# Altium PCB SDC.PcbDoc (part 1 of 2)
Units mm, origin at the board's own origin, x right, y up, seen from the top; angles counter-clockwise.
Board outline 130 x 100 mm, 4 copper layers (Top Layer, Ground Plane, Power Plane, Bottom Layer), stack 1.666 mm thick; 140 components, 375 nets, 501 pads, 368 vias.
Unrouted connection lines stored in the file: 16.
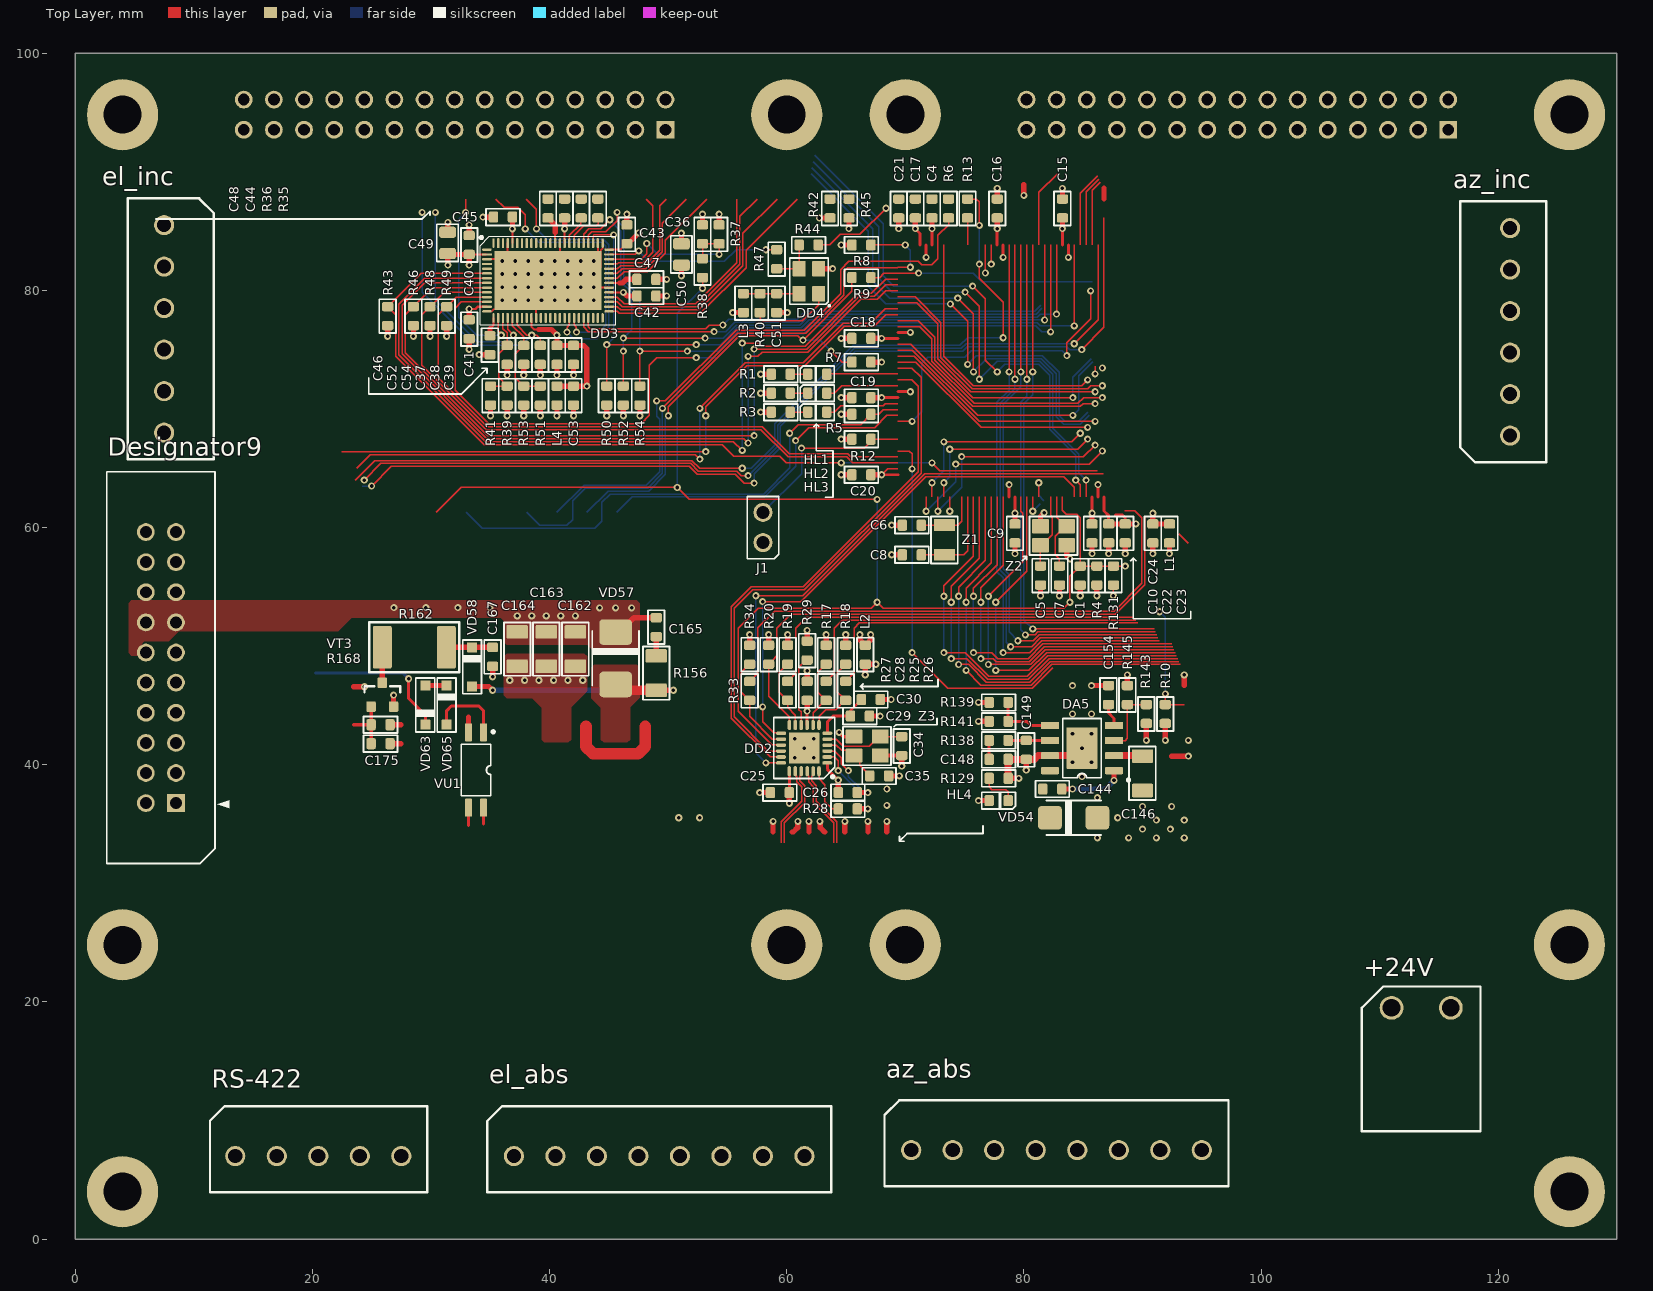
[diagram p0: Top Layer view]
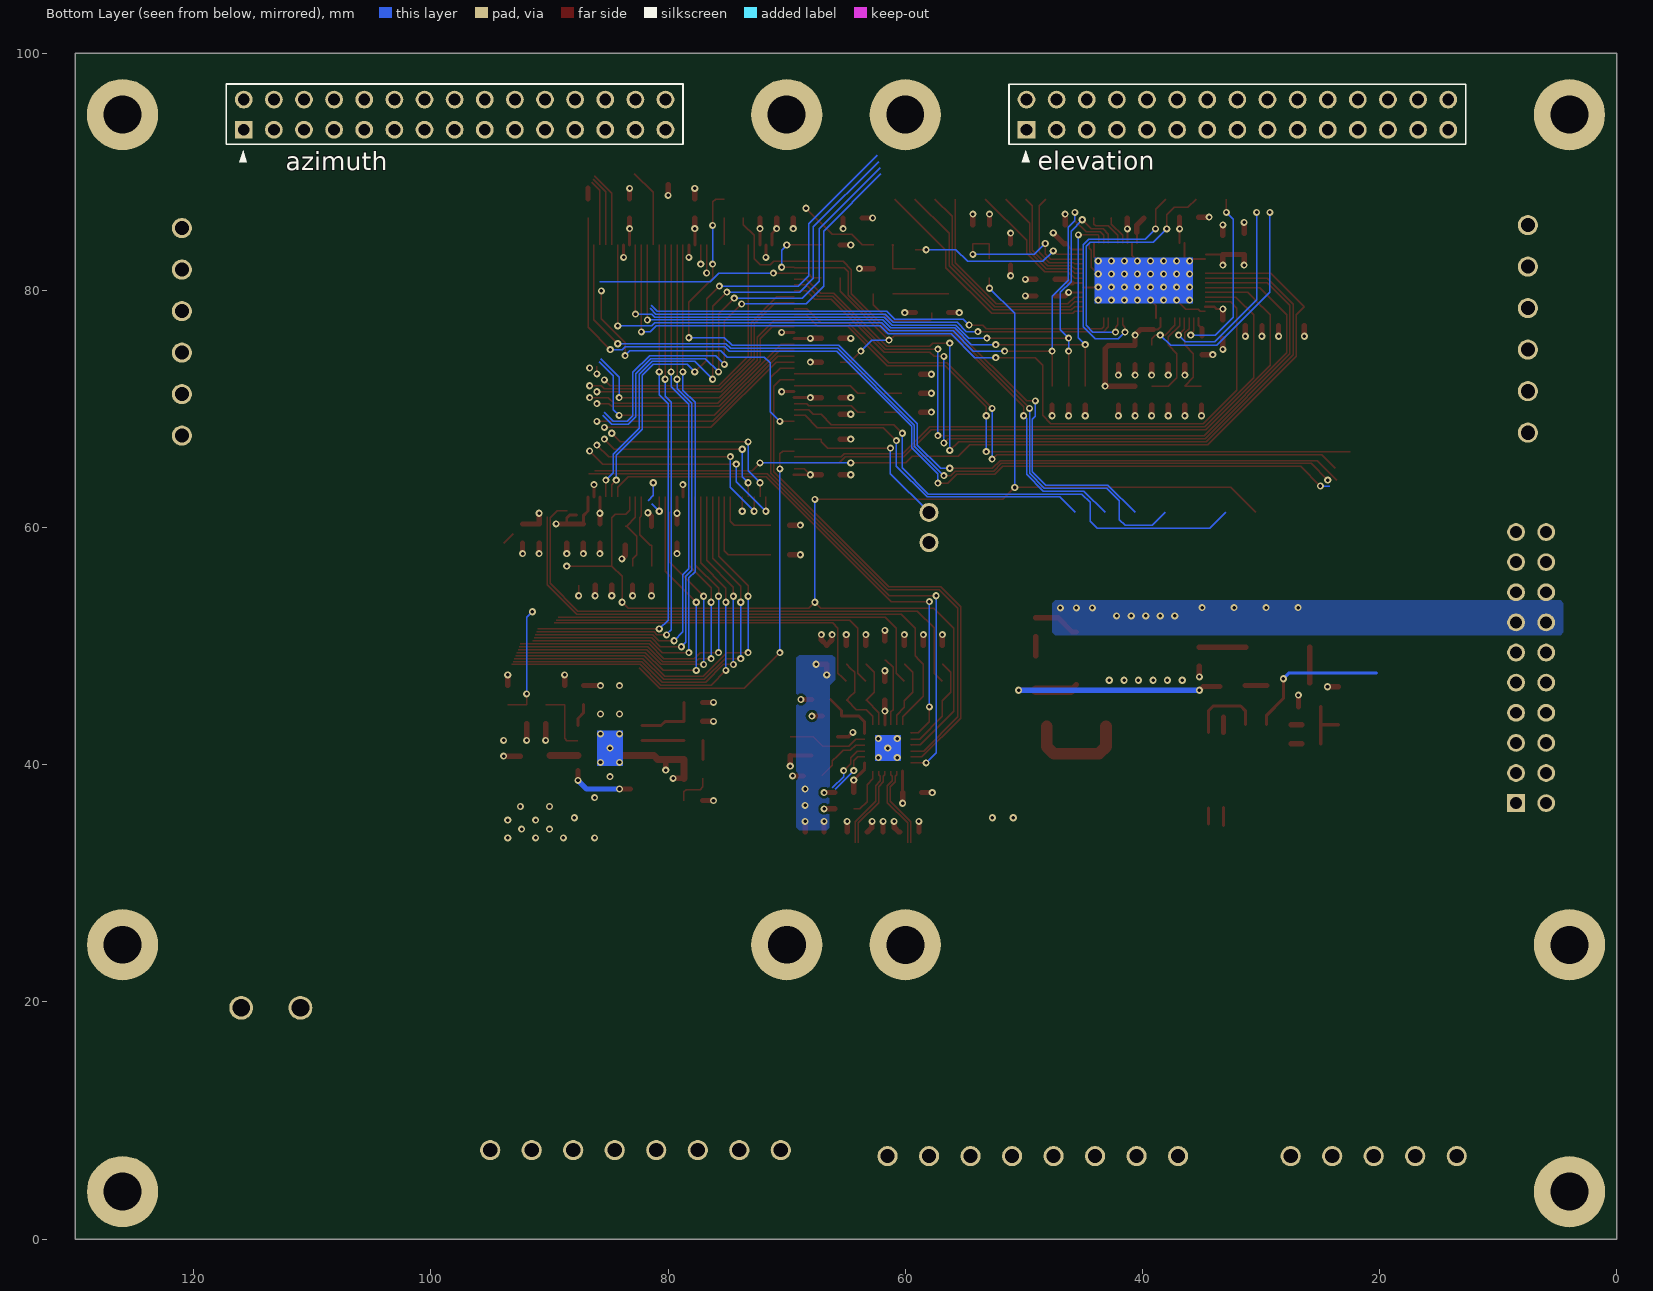
[diagram p1: Bottom Layer view, seen from below]
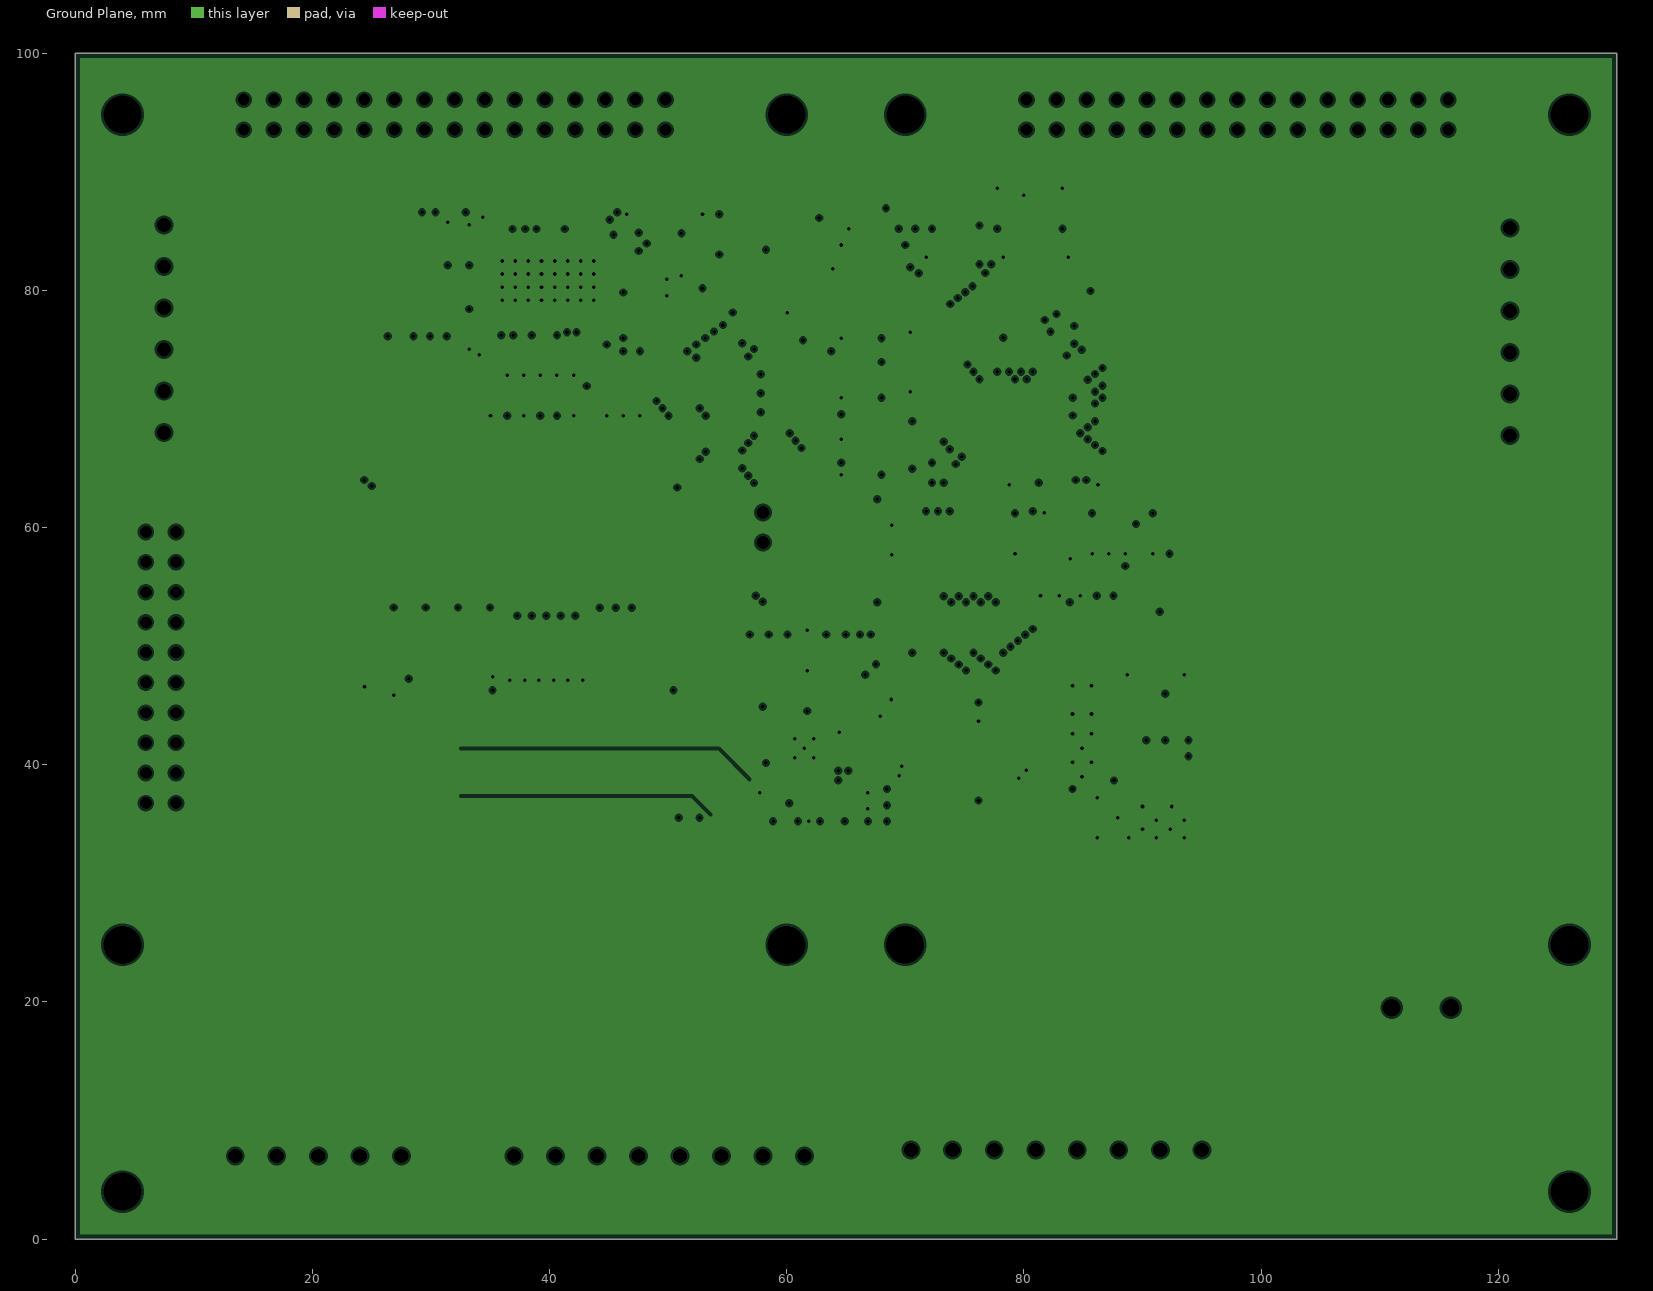
[diagram p2: Ground Plane, clearances drawn from the general rule]
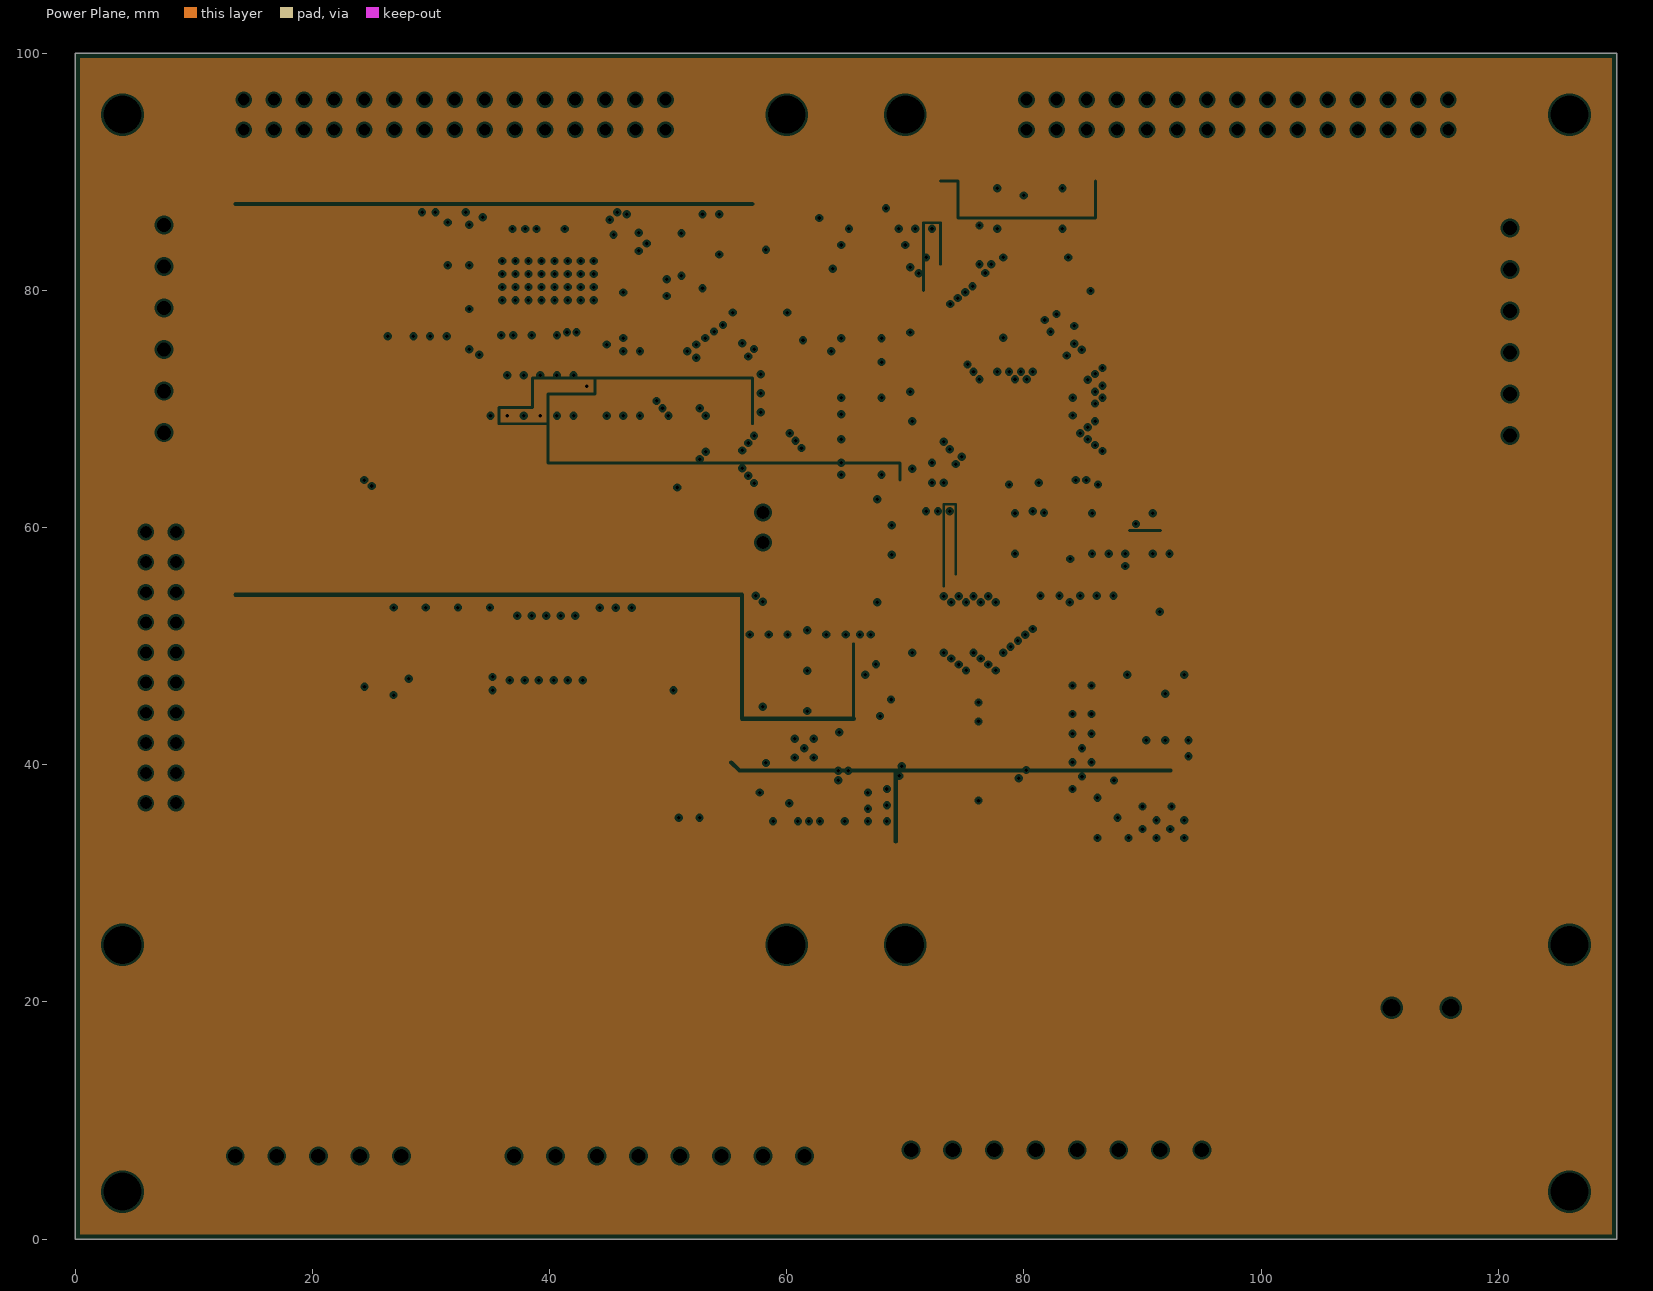
[diagram p3: Power Plane, clearances drawn from the general rule]
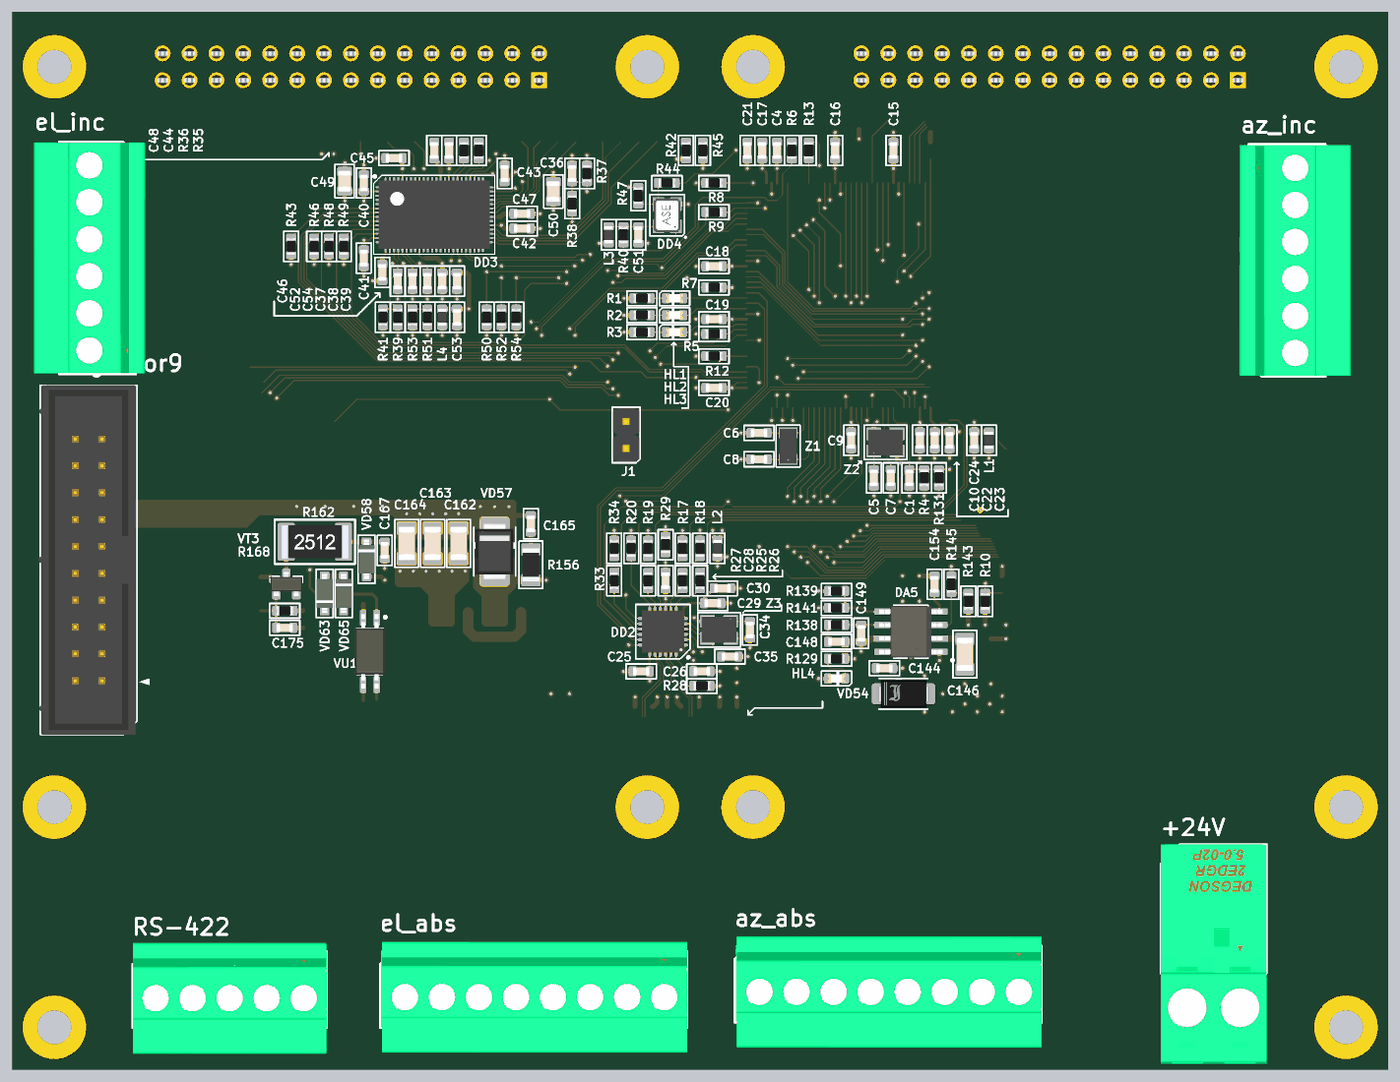
[diagram p5: 3D render of the assembled board from above, using the file's embedded part models]

## Layer stack, top to bottom
Top Solder: solder mask 0.01, Solder Resist, Dk 3.5
Top Layer: signal copper 0.018
Dielectric 1: prepreg 0.115, Dk 4.2
Ground Plane: plane copper 0.018, net (Multiple Nets)
Dielectric 3: core 1.364, Dk 4.2
Power Plane: plane copper 0.018, net (Multiple Nets)
Dielectric 2: prepreg 0.115, Dk 4.2
Bottom Layer: signal copper 0.018
Bottom Solder: solder mask 0.01, Solder Resist, Dk 3.5

## Board outline
0,0 0,100 130,100 130,0

## Design rules (kind name [scope] priority, off if disabled: settings)
Clearance ClearancePoly [InPolygon] p1: gap=0.2 ignorepadtopadclearanceinfootprint=FALSE except(0: Arc-Hole Track-Hole SMDPad-Hole THPad-Hole Via-Hole Fill-Hole Poly-Hole Region-Hole Text-Hole)
Clearance [All] p2: gap=0.125 ignorepadtopadclearanceinfootprint=FALSE except(0: Arc-Hole Track-Hole SMDPad-Hole THPad-Hole Via-Hole Fill-Hole Poly-Hole Region-Hole Text-Hole)
ComponentClearance [All] p1: gap=0 collisioncheckmode=3 verticalgap=0 showdistances=FALSE
DiffPairsRouting Ethernet_DP [(InDifferentialPairClass('ETH_RX') OR InDifferentialPairClass('ETH_TX'))] p1: maxlimit=0.13 minlimit=0.13 mostfreqgap=0.13 toplayer_minwidth=0.125 toplayer_maxwidth=0.125 toplayer_prefwidth=0.125 bottomlayer_minwidth=0.125 bottomlayer_maxwidth=0.125 bottomlayer_prefwidth=0.125 maxuncoupledlength=15
DiffPairsRouting [All] p2: maxlimit=0.254 minlimit=0.254 mostfreqgap=0.254 toplayer_minwidth=0.381 toplayer_maxwidth=0.381 toplayer_prefwidth=0.381 bottomlayer_minwidth=0.381 bottomlayer_maxwidth=0.381 bottomlayer_prefwidth=0.381 maxuncoupledlength=12.7
Height [All] p1: minheight=0 maxheight=100 prefheight=100
HoleSize [All] p1: absolutevalues=TRUE maxlimit=5 minlimit=0.3 maxpercent=80.000 minpercent=20.000
HoleToHoleClearance [All] p1: gap=0.2 allowstackedmicrovias=TRUE
MinimumAnnularRing MinimumAnnularRing_0.3 [Not IsVia] p1: minimumring=0.2
MinimumSolderMaskSliver [All] p1: minsoldermaskwidth=0.15
PlaneClearance [All] p1: clearance=0.2
PlaneConnect [All] p1: planeconnectstyle=Direct reliefexpansion=0.508 reliefentries=4 reliefconductorwidth=0.254 reliefairgap=0.254
PolygonConnect PolygonConnectVIA [IsVia] p1: connectstyle=Direct reliefconductorwidth=0.254 reliefentries=4 polygonreliefangle="90 Angle" airgapwidth=0.254
PolygonConnect [All] p2: connectstyle=Direct reliefconductorwidth=0.3 reliefentries=4 polygonreliefangle="90 Angle" airgapwidth=0.3
RoutingVias [IsVia] p1: holewidth=0.3 width=0.6 viastyle="Through Hole" minholewidth=0.3 minwidth=0.6 maxholewidth=2 maxwidth=1.5
SilkToSilkClearance [All] p1: silktosilkclearance=0
SilkToSolderMaskClearance [IsPad] p1: minsilkscreentomaskgap=0 clearancetoexposedcopper=TRUE
SolderMaskExpansion [All] p1: expansion=0.05 istentingtop=FALSE
Width Width_Arcs [IsArc] p1: maxlimit=0.254 minlimit=0.1 preferedwidth=0.254
Width [All] p2: maxlimit=10 minlimit=0.125 preferedwidth=0.125
20 further rules are at their usual default settings.

## Classes and differential pairs
differential pair class ETH_TX: ETH_TX
differential pair class ETH_RX: ETH_RX
component class POE: C162 C163 C164 C165 C167 C175 R156 R162 R168 VD57 VD58 VD63 VD65 VT3 VU1
component class DRIVER_A: C36 C37 C38 C39 C40 C41 C42 C43 C44 C45 C46 C47 C48 C49 C50 C51 C52 C53 C54 DD3 DD4 L3 L4 R35 R36 R37 R38 R39 R40 R41 R42 R43 R44 R45 R46 R47 R48 R49 R50 R51 R52 R53 R54
component class MCU: C1 C4 C5 C6 C7 C8 C9 C10 C15 C16 C17 C18 C19 C20 C21 C22 C23 C24 HL1 HL2 HL3 J1 L1 R1 R2 R3 R4 R5 R6 R7 R8 R9 R10 R12 R13 Z1 Z2
component class ETHERNET: C25 C26 C28 C29 C30 C34 C35 DD2 FV6 L2 R17 R18 R19 R20 R25 R26 R27 R28 R29 R33 R34 Z3
component class POWER: C144 C146 C148 C149 C154 DA5 HL4 R129 R131 R138 R139 R141 R143 R145 VD54
differential pair ETH_TX: +ETH_TX_P -ETH_TX_N
differential pair ETH_RX: +ETH_RX_P -ETH_RX_N

## Components (designator, comment, footprint, x,y, rotation, side; value= is the part's Value field where it differs from the comment)
+24V "Comment" "5 1x2 r" 113.5,19.5 r0 top
az_abs "Comment" "3.5 1X8" 82.75,7.5 r0 top
az_inc "Comment" "3.5 1X6" 121,76.5 r90 top
azimuth "Comment" 2.54_30P_2X15_PBD 98.002,94.816 r180 bottom
C1 "0.1uF" C0603 84.75,55.95 r90 top
C4 "2.2uF" C0603 72.25,86.9 r270 top
C5 "6.8pF" C0603 81.4,55.95 r270 top
C6 "4.7pF" C0603 70.55,60.2 r180 top
C7 "6.8pF" C0603 83,55.95 r270 top
C8 "4.7pF" C0603 70.55,57.7 r180 top
C9 "0.1uF" C0603 79.25,59.5 r90 top
C10 "0.1uF" C0603 85.75,59.5 r90 top
C15 "0.1uF" C0603 83.25,86.9 r270 top
C16 "0.1uF" C0603 77.75,86.9 r270 top
C17 "0.1uF" C0603 70.85,86.9 r270 top
C18 "0.1uF" C0603 66.3,75.95 r0 top
C19 "0.1uF" C0603 66.3,70.95 r0 top
C20 "0.1uF" C0603 66.3,64.45 r0 top
C21 "4.7uF" C0603 69.45,86.9 r270 top
C22 "0.1uF" C0603 87.15,59.5 r90 top
C23 "0.1uF" C0603 88.55,59.5 r90 top
C24 "4.7uF" C0603 90.875,59.5 r90 top
C25 "0.1uF" C0603 59.425,37.65 r0 top
C26 "0.1uF" C0603 65.15,37.65 r180 top
C28 "0.1uF" C0603 61.725,46.225 r270 top
C29 "470pF" C0603 66.175,44.1 r180 top
C30 "1uF" C0603 67.1,45.5 r180 top
C34 "6.8pF" C0603 69.7,41.575 r270 top
C35 "6.8pF" C0603 67.8,39.05 r0 top
C36 "0.1uF" C0603 52.9,84.725 r270 top
C37 "0.1uF" C0603 39.225,74.55 r90 top
C38 "0.1uF" C0603 40.625,74.55 r90 top
C39 "4.7uF" C0603 42.025,74.55 r90 top
C40 "0.1uF" C0603 33.225,83.825 r270 top
C41 "0.1uF" C0603 33.225,76.725 r90 top
C42 "0.1uF" C0603 48.175,79.525 r180 top
C43 "0.1uF" C0603 46.525,84.725 r270 top
C44 "0.1uF" C0603 41.275,86.9 r270 top
C45 "0.1uF" C0603 36.075,86.175 r0 top
C46 "0.1uF" C0603 34.975,75.375 r90 top
C47 "0.1uF" C0603 48.175,80.925 r180 top
C48 "0.1uF" C0603 39.875,86.9 r270 top
C49 "22uF" C0805 31.4,84 r270 top
C50 "22uF" C0805 51.125,83.025 r90 top
C51 "10nF" C0603 59.15,78.925 r270 top
C52 "0.1uF" C0603 36.425,74.55 r90 top
C53 "1uF" C0603 42.025,71.125 r90 top
C54 "0.1uF" C0603 37.825,74.55 r90 top
C144 "0.1uF" C0603 82.4,37.95 r0 top
C146 "10uF" C1206 90,39.275 r90 top
C148 "1nF" C0603 77.875,40.45 r180 top
C149 "6.8pF" C0603 80.2,41.25 r90 top
C154 "8.2nF" C0603 87.125,45.875 r270 top
C162 "10uF" C1206 42.175,49.75 r90 top
C163 "10uF" C1206 39.725,49.75 r90 top
C164 "10uF" C1206 37.275,49.75 r90 top
C165 "680pF" C0603 49,51.6 r90 top
C167 "0.1uF" C0603 35.2,49.1 r270 top
C175 "0.1uF" C0603 25.75,41.775 r180 top
DA5 "TPS54332" SOIC8-EP 84.9,41.4 r180 top
DD2 "LAN8742AI-CZ" S4QFN-24 61.475,41.4 r180 top
DD3 "TMC4671-LA" QFN76-EP 39.875,80.825 r0 top
DD4 "25MHz" ASE 61.875,80.775 r90 top
Designator9 "Comment" 2.54_20P_2X10_BOX 7.23,48.19 r90 top
el_abs "Comment" "3.5 1X8" 49.25,7 r0 top
el_inc "Comment" "3.5 1X6" 7.5,76.75 r270 top
elevation "Comment" 2.54_30P_2X15_PBD 32,94.81 r180 bottom
HL1 "GNL-0603SRC" LED0603 62.575,72.925 r0 top
HL2 "GNL-0603GC" LED0603 62.575,71.325 r0 top
HL3 "GNL-0603GC" LED0603 62.575,69.725 r0 top
HL4 "GNL-0603GC" LED0603 77.875,36.975 r180 top
J1 "MCU Boot" 2.54_2x1 58,60 r90 top
L1 "600R, 500mA" L0603 92.275,59.5 r90 top
L2 "600R, 500mA" L0603 66.625,49.275 r270 top
L3 "600R, 500mA" L0603 56.35,78.925 r270 top
L4 "600R, 500mA" L0603 40.625,71.125 r90 top
R1 "1.5k" R0603 59.5,72.925 r0 top
R2 "1.5k" R0603 59.5,71.325 r0 top
R3 "1.5k" R0603 59.5,69.725 r0 top
R4 "10k" R0603 86.15,55.95 r90 top
R5 "10k" R0603 66.3,69.55 r0 top
R6 "10k" R0603 73.65,86.9 r270 top
R7 "DNI" R0603 66.3,73.95 r180 top
R8 "10k" R0603 66.3,83.825 r180 top
R9 "0" R0603 66.3,81.075 r0 top
R10 "27k" R0603 91.925,44.275 r270 top
R12 "1k" R0603 66.3,67.45 r180 top
R13 "1k" R0603 75.25,86.9 r90 top
R17 "10k" R0603 63.325,49.275 r270 top
R18 "10k" R0603 64.975,49.275 r270 top
R19 "10k" R0603 60.075,49.275 r270 top
R20 "1.5k" R0603 58.475,49.275 r270 top
R25 "33" R0603 63.325,46.225 r90 top
R26 "33" R0603 64.975,46.225 r90 top
R27 "33" R0603 60.075,46.225 r90 top
R28 "12.1k" R0603 65.15,36.275 r180 top
R29 "10k" R0603 61.725,49.625 r270 top
R33 "33" R0603 56.875,46.225 r90 top
R34 "10k" R0603 56.875,49.275 r270 top
R35 "10k" R0603 44.075,86.9 r90 top
R36 "10k" R0603 42.675,86.9 r90 top
R37 "10k" R0603 54.3,84.725 r90 top
R38 "0" R0603 52.9,81.875 r270 top
R39 "10k" R0603 36.425,71.125 r270 top
R40 "1k" R0603 57.75,78.925 r270 top
R41 "10k" R0603 35.025,71.125 r90 top
R42 "10k" R0603 63.65,86.9 r270 top
R43 "10k" R0603 26.35,77.825 r270 top
R44 "33" R0603 61.85,83.825 r180 top
R45 "10k" R0603 65.25,86.9 r270 top
R46 "10k" R0603 28.525,77.825 r270 top
R47 "33" R0603 59.15,82.625 r270 top
R48 "10k" R0603 29.925,77.825 r270 top
R49 "10k" R0603 31.325,77.825 r270 top
R50 "10k" R0603 44.825,71.125 r270 top
R51 "10k" R0603 39.225,71.125 r270 top
R52 "10k" R0603 46.225,71.125 r270 top
R53 "10k" R0603 37.825,71.125 r90 top
R54 "10k" R0603 47.625,71.125 r270 top
R129 "4.02k" R0603 77.875,38.85 r180 top
R131 "0" R0603 87.55,55.95 r90 top
R138 "39.2k" R0603 77.875,42.05 r180 top
R139 "10.2k" R0603 77.875,45.25 r0 top
R141 "1.96k" R0603 77.875,43.65 r180 top
R143 "332k" R0603 90.325,44.275 r90 top
R145 "68.1k" R0603 88.725,45.875 r90 top
R156 "24" R1206 49,47.725 r270 top
R162 "200" R2512 28.6,49.9 r0 top
R168 "10k" R0603 25.75,43.375 r0 top
RS-422 "Comment" "3.5 1X5" 20.5,7 r0 top
VD54 "B340A-13-F" SMA 84.2,35.525 r0 top
VD57 "B260-13-F" SMB 45.575,48.975 r270 top
VD58 "MMSD4148T1G" SOD123 33.475,48.25 r270 top
VD63 "6.2V" SOD123 29.525,45.025 r90 top
VD65 "6.2V" SOD123 31.325,45.025 r270 top
VT3 "BSS138K" SOT23 25.9,45.9 r0 top
VU1 "FODM217AR2" "MFP4 2.5x4.4" 33.8,39.55 r180 top
Z1 "32768Hz" NX3215SA 73.3,58.95 r90 top
Z2 "25MHz" NX3225GA 82.5,59.3 r0 top
Z3 "25MHz" NX3225GA 66.775,41.575 r180 top

## Footprints (in the part's own frame and the unit in brackets; to place one, negate y for a bottom-side part, rotate by r counter-clockwise, add the part's x,y. Pads: shape width x height; smd on the part's side, far side on the other; paste and mask are expansions set on the pad)
2.54_2x1 [mm] "2.54 Pin Header, 2 pins"
  round 1.6 hole 1.1: 1(-1.27,0) 2(1.27,0)
  silkscreen extent -2.63,-1.33 2.63,1.33, body extent -2.54,-1.27 2.54,1.27, height 8.54
2.54_20P_2X10_BOX [mm] "20 pin, 2x10, 2.54 mm pitch Male Box Header"
  rect 1.5x1.5 hole 1: 1(-11.43,-1.27)
  round 1.5 hole 1: 2(-11.43,1.27) 3(-8.89,-1.27) 4(-8.89,1.27) 5(-6.35,-1.27) 6(-6.35,1.27) 7(-3.81,-1.27) 8(-3.81,1.27) 9(-1.27,-1.27) 10(-1.27,1.27) 11(1.27,-1.27) 12(1.27,1.27) 13(3.81,-1.27) 14(3.81,1.27) 15(6.35,-1.27) 16(6.35,1.27) 17(8.89,-1.27) 18(8.89,1.27) 19(11.43,-1.27) 20(11.43,1.27)
  silkscreen extent -16.51,-5.75 16.51,4.57, body extent -16.53,-4.42 16.53,4.75, height 9.13
2.54_30P_2X15_PBD [mm] "30 pin, 2x15, 2.54 mm pitch Male Box Header"
  rect 1.5x1.5 hole 1: 1(-17.78,-1.27)
  round 1.5 hole 1: 2(-17.78,1.27) 3(-15.24,-1.27) 4(-15.24,1.27) 5(-12.7,-1.27) 6(-12.7,1.27) 7(-10.16,-1.27) 8(-10.16,1.27) 9(-7.62,-1.27) 10(-7.62,1.27) 11(-5.08,-1.27) 12(-5.08,1.27) 13(-2.54,-1.27) 14(-2.54,1.27) 15(0,-1.27) 16(0,1.27) 17(2.54,-1.27) 18(2.54,1.27) 19(5.08,-1.27) 20(5.08,1.27) 21(7.62,-1.27) 22(7.62,1.27) 23(10.16,-1.27) 24(10.16,1.27) 25(12.7,-1.27) 26(12.7,1.27) 27(15.24,-1.27) 28(15.24,1.27) 29(17.78,-1.27) 30(17.78,1.27)
  silkscreen extent -19.25,-4 19.25,2.57, body extent -19.3,-2.52 19.3,2.48, height 8.5
"3.5 1X5" [mm]
  round 1.7 hole 1.2: 1(-7,0) 2(-3.5,0) 3(0,0) 4(3.5,0) 5(7,0)
  silkscreen extent -9.13,-3.05 9.2,4.2, body extent -9.1,-5.5 9.25,5, height 22.1
"3.5 1X6" [mm]
  round 1.7 hole 1.2: 1(-8.75,0) 2(-5.25,0) 3(-1.75,0) 4(1.75,0) 5(5.25,0) 6(8.75,0)
  silkscreen extent -11,-3.05 11,4.2, body extent -10.9,-5.45 10.9,5.05, height 22.1
"3.5 1X8" [mm]
  round 1.7 hole 1.2: 1(-12.25,0) 2(-8.75,0) 3(-5.25,0) 4(-1.75,0) 5(1.75,0) 6(5.25,0) 7(8.75,0) 8(12.25,0)
  silkscreen extent -14.5,-3.05 14.5,4.2, body extent -14.4,-5.4 14.5,5.1, height 22.1
"5 1x2 r" [mm]
  round 2 hole 1.5: 1(-2.5,0) 2(2.5,0)
  silkscreen extent -5,-10.4 5,1.8, body extent -5,-18.95 5,1.8, height 15.1
ASE [mm] "3.2x2.5mm Crystal Oscillator ASE Series"
  rrect10% 1.3x1.1 smd: 1(-1.05,-0.825) 2(1.05,-0.825) 3(1.05,0.825) 4(-1.05,0.825)
  silkscreen extent -2.12,-1.78 1.95,1.63, body extent -1.6,-1.25 1.6,1.25, height 1.25
C0603 [mm]
  rrect40% 0.8x0.95 smd: 1(-0.8,0) 2(0.8,0)
  silkscreen extent -1.43,-0.7 1.43,0.7, body extent -0.8,-0.4 0.8,0.4, height 0.81
C0805 [mm]
  rrect40% 0.95x1.4 smd: 1(-0.9,0) 2(0.9,0)
  silkscreen extent -1.58,-0.9 1.58,0.9, body extent -1,-0.62 1,0.63, height 1.26
C1206 [mm]
  rrect20% 1.15x1.8 smd: 1(-1.45,0) 2(1.45,0)
  silkscreen extent -2.25,-1.12 2.25,1.12, body extent -1.6,-0.8 1.6,0.8, height 1.61
L0603 [mm]
  rrect40% 0.8x0.95 smd: 1(-0.8,0) 2(0.8,0)
  silkscreen extent -1.43,-0.7 1.43,0.7, body extent -0.8,-0.4 0.8,0.4, height 0.8
LED0603 [mm] "LED SMD 0603"
  rrect40% 0.8x0.95 smd: 1(-0.8,0) 2(0.8,0)
  silkscreen extent -1.43,-0.7 1.43,0.7, body extent -0.8,-0.4 0.8,0.4, height 0.7
"MFP4 2.5x4.4" [mm] "MFP4 2.5x4.4, 1.27P  CASE 100AL  ISSUE O"
  rrect30% 0.61x1.52 smd: 1(-0.635,-3.175) 2(0.635,-3.175) 3(0.635,3.175) 4(-0.635,3.175)
  silkscreen extent -1.55,-3.32 1.25,2.17, body extent -1.43,-3.5 1.43,3.5, height 2.1
NX3215SA [mm] "Crystal Unit"
  rrect10% 1x1.8 smd: 1(-1.25,0) 2(1.25,0)
  silkscreen extent -1.97,-1.12 1.97,1.12, body extent -1.65,-0.8 1.65,0.8, height 0.89
NX3225GA [mm] "Crystal Unit"
  rrect10% 1.4x1.2 smd: 1(-1.1,-0.8) 2(-1.1,0.8) 2(1.1,-0.8) 3(1.1,0.8)
  silkscreen extent -2.02,-1.63 2.02,1.63, body extent -1.65,-1.29 1.65,1.3, height 0.74
QFN76-EP [mm] "QFN76 with Exposed Pad"
  oval 0.8x0.2 smd mask+0.051: 1(-5.15,2.6) 14(-5.15,-2.6) 39(5.15,-2.6) 52(5.15,2.6)
  oval 0.85x0.2 smd mask+0.051: 2(-5.15,2.2) 3(-5.15,1.8) 4(-5.15,1.4) 5(-5.15,1) 6(-5.15,0.6) 7(-5.15,0.2) 8(-5.15,-0.2) 9(-5.15,-0.6) 10(-5.15,-1) 11(-5.15,-1.4) 12(-5.15,-1.8) 13(-5.15,-2.2) 40(5.15,-2.2) 41(5.15,-1.8) 42(5.15,-1.4) 43(5.15,-1) 44(5.15,-0.6) 45(5.15,-0.2) 46(5.15,0.2) 47(5.15,0.6) 48(5.15,1) 49(5.15,1.4) 50(5.15,1.8) 51(5.15,2.2)
  oval 0.2x0.8 smd mask+0.051: 15(-4.6,-3.15) 38(4.6,-3.15) 53(4.6,3.15) 76(-4.6,3.15)
  oval 0.2x0.85 smd mask+0.051: 16(-4.2,-3.15) 17(-3.8,-3.15) 18(-3.4,-3.15) 19(-3,-3.15) 20(-2.6,-3.15) 21(-2.2,-3.15) 22(-1.8,-3.15) 23(-1.4,-3.15) 24(-1,-3.15) 25(-0.6,-3.15) 26(-0.2,-3.15) 27(0.2,-3.15) 28(0.6,-3.15) 29(1,-3.15) 30(1.4,-3.15) 31(1.8,-3.15) 32(2.2,-3.15) 33(2.6,-3.15) 34(3,-3.15) 35(3.4,-3.15) 36(3.8,-3.15) 37(4.2,-3.15) 54(4.2,3.15) 55(3.8,3.15) 56(3.4,3.15) 57(3,3.15) 58(2.6,3.15) 59(2.2,3.15) 60(1.8,3.15) 61(1.4,3.15) 62(1,3.15) 63(0.6,3.15) 64(0.2,3.15) 65(-0.2,3.15) 66(-0.6,3.15) 67(-1,3.15) 68(-1.4,3.15) 69(-1.8,3.15) 70(-2.2,3.15) 71(-2.6,3.15) 72(-3,3.15) 73(-3.4,3.15) 74(-3.8,3.15) 75(-4.2,3.15)
  rect 9x5 smd: 77(0,0)
  silkscreen extent -5.72,-3.72 5.72,3.72, body extent -5.25,-3.25 5.25,3.25, height 0.9
R0603 [mm]
  rrect40% 0.8x0.95 smd: 1(-0.8,0) 2(0.8,0)
  silkscreen extent -1.43,-0.7 1.43,0.7, body extent -0.8,-0.4 0.8,0.4, height 0.45
R1206 [mm]
  rrect20% 1.15x1.8 smd: 1(-1.45,0) 2(1.45,0)
  silkscreen extent -2.25,-1.12 2.25,1.12, body extent -1.55,-0.8 1.55,0.8, height 0.65
R2512 [mm] "Resistor 2512"
  rrect20% 1.6x3.6 smd: 1(-2.7,0) 2(2.7,0)
  silkscreen extent -3.8,-2.1 3.8,2.1, body extent -3.13,-1.58 3.17,1.58, height 0.82
S4QFN-24 [mm] "VQFN24 with Exposed Pad, 0.5mm pitch"
  rrect100% 0.85x0.3 smd mask+0.07: 1(-1.95,1.25) 2(-1.95,0.75) 3(-1.95,0.25) 4(-1.95,-0.25) 5(-1.95,-0.75) 6(-1.95,-1.25) 13(1.95,-1.25) 14(1.95,-0.75) 15(1.95,-0.25) 16(1.95,0.25) 17(1.95,0.75) 18(1.95,1.25)
  rrect100% 0.3x0.85 smd mask+0.07: 7(-1.25,-1.95) 8(-0.75,-1.95) 9(-0.25,-1.95) 10(0.25,-1.95) 11(0.75,-1.95) 12(1.25,-1.95) 19(1.25,1.95) 20(0.75,1.95) 21(0.25,1.95) 22(-0.25,1.95) 23(-0.75,1.95) 24(-1.25,1.95)
  rrect5% 2.6x2.6 smd paste-20 mask+0.07: 25(0,0)
  silkscreen extent -2.58,-2.58 2.58,2.58, body extent -2.05,-2.05 2.05,2.05, height 1
SMA [mm] "SMA Package"
  rrect30% 2x2 smd: 1(-2,0) 2(2,0)
  silkscreen extent -2.3,-1.45 2.3,1.45, body extent -2.56,-1.35 2.56,1.35, height 1.96
SMB [mm] "SMB Package"
  rrect30% 2.159x2.743 smd: 1(-2.21,0) 2(2.21,0)
  silkscreen extent -2.3,-1.98 2.3,1.97, body extent -2.72,-1.78 2.72,1.78, height 2.31
SOD123 [mm] "SOD?123 CASE 425?04 ISSUE G"
  rrect10% 0.85x0.85 smd: 1(-1.65,0) 2(1.65,0)
  silkscreen extent -2.27,-0.8 2.27,0.8, body extent -1.85,-0.77 1.85,0.78, height 1.25
SOIC8-EP [mm] "SOIC8 with Exposed Pad"
  rrect30% 1.55x0.6 smd: 1(-2.7,1.905) 2(-2.7,0.635) 3(-2.7,-0.635) 4(-2.7,-1.905) 5(2.7,-1.905) 6(2.7,-0.635) 7(2.7,0.635) 8(2.7,1.905)
  rrect5% 2.62x3.51 smd: 9(0,0)
  silkscreen extent -4.03,-2.5 1.63,2.79, body extent -2.98,-2.45 2.98,2.45, height 1.51
SOT23 [mm]
  rrect30% 0.8x0.9 smd: 1(-0.95,-1) 2(0.95,-1) 3(0,1)
  silkscreen extent -1.5,0.2 1.5,0.7, body extent -1.5,-1.13 1.5,1.13, height 1.21

## Part data
C1 C4 C5 C6 C7 C8 C9 C10 C15 C16 C17 C18 C19 C20 C21 C22 C23 C24 C25 C26 C28 C29 C30 C34 C35 C36 C37 C38 C39 C40 C41 C42 C43 C44 C45 C46 C47 C48 C49 C50 C51 C52 C53 C54 C144 C146 C148 C149 C154 C162 C163 C164 C165 C167 C175: library part CAP, "Керамический конденсатор", Вид монтажа=SMD
  C1 C9 C10 C15 C16 C17 C18 C19 C20 C22 C23 C25 C26 C28 C36 C37 C38 C40 C41 C42 C43 C44 C45 C46 C47 C48 C52 C54 C144 C167 C175: Артикул=CL10B104KB8NNNC, Диэлектрик=X7R, Корпус="0603 (1608 Metric)", Напряжение=50V, Номинал=0.1uF, Производитель="Samsung Electro-Mechanics", Строка для документации=https://mm.digikey.com/Volume0/opasdata/d220001/medias/docus/609/CL10B104KB8NNNC_Spec.pdf, Температурный диапазон="-55°C ~ 125°C", Тип элемента="Керамический конденсатор", Точность=10%
  C4: Артикул=CL10A225KO8NNNC, Диэлектрик=X5R, Корпус="0603 (1608 Metric)", Напряжение=16V, Номинал=2.2uF, Производитель="Samsung Electro-Mechanics", Строка для документации=https://mm.digikey.com/Volume0/opasdata/d220001/medias/docus/421/CL10A225KO8NNNC_Spec.pdf, Температурный диапазон="-55°C ~ 85°C", Тип элемента=Конденсатор, Точность=10%
  C5 C7 C34 C35 C149: Артикул=CC0603CRNPO9BN6R8, Диэлектрик=NP0, Корпус="0603 (1608 Metric)", Напряжение=50V, Номинал=6.8pF, Производитель=Yageo, Строка для документации=https://www.yageo.com/upload/media/product/productsearch/datasheet/mlcc/UPY-GP_NP0_16V-to-50V_18.pdf, Температурный диапазон="-55°C ~ 125°C", Тип элемента=Конденсатор, Точность=0.25pF
  C6 C8: Артикул=CC0603CRNPO9BN4R7, Диэлектрик=NP0, Корпус="0603 (1608 Metric)", Напряжение=50V, Номинал=4.7pF, Производитель=Yageo, Строка для документации=https://www.yageo.com/upload/media/product/productsearch/datasheet/mlcc/UPY-GP_NP0_16V-to-50V_18.pdf, Температурный диапазон="-55°C ~ 125°C", Тип элемента="Керамический конденсатор", Точность=0.25pF
  C21 C24 C39: Артикул=CL10A475KO8NNNC, Диэлектрик=X5R, Корпус="0603 (1608 Metric)", Напряжение=16V, Номинал=4.7uF, Производитель="Samsung Electro-Mechanics", Строка для документации=https://mm.digikey.com/Volume0/opasdata/d220001/medias/docus/2328/CL10A475KO8NNNC_Spec.pdf, Температурный диапазон="-55°C ~ 85°C", Тип элемента="Керамический конденсатор", Точность=10%
  C29: Артикул=CL10C471JB8NNNC, Диэлектрик=NP0, Корпус="0603 (1608 Metric)", Напряжение=50V, Номинал=470pF, Производитель="Samsung Electro-Mechanics", Строка для документации=https://www.samsungsem.com/resources/file/global/support/product_catalog/MLCC.pdf, Температурный диапазон="-55°C ~ 125°C", Тип элемента="Керамический конденсатор", Точность=5%
  C30 C53: Артикул=CL10B105KO8NNNC, Диэлектрик=X7R, Корпус="0603 (1608 Metric)", Напряжение=16V, Номинал=1uF, Производитель="Samsung Electro-Mechanics", Строка для документации=https://weblib.samsungsem.com/mlcc/mlcc-ec-data-sheet.do?partNumber=CL10B105KO8NNN, Температурный диапазон="-55°C ~ 125°C", Тип элемента="Керамический конденсатор", Точность=10%
  C49 C50: Артикул=CL21A226MOCLRNC, Диэлектрик=X5R, Корпус="0805 (2012 Metric)", Напряжение=16V, Номинал=22uF, Производитель="Samsung Electro-Mechanics", Строка для документации=https://mm.digikey.com/Volume0/opasdata/d220001/medias/docus/43/CL21A226MOCLRNC_Spec.pdf, Температурный диапазон="-55°C ~ 125°C", Тип элемента="Керамический конденсатор", Точность=10%
  C51: Артикул=CL10B103KB8NNNC, Диэлектрик=X7R, Корпус="0603 (1608 Metric)", Напряжение=50V, Номинал=10nF, Производитель="Samsung Electro-Mechanics", Строка для документации=https://mm.digikey.com/Volume0/opasdata/d220001/medias/docus/609/CL10B103KB8NNNC_Spec.pdf, Температурный диапазон="-55°C ~ 125°C", Тип элемента="Керамический конденсатор", Точность=10%
  C146 C162 C163 C164: Артикул=CL31B106KBHNNNE, Диэлектрик=X7R, Корпус="1206 (3216 Metric)", Напряжение=50V, Номинал=10uF, Производитель="Samsung Electro-Mechanics", Строка для документации=https://mm.digikey.com/Volume0/opasdata/d220001/medias/docus/41/CL31B106KBHNNNE_Spec.pdf, Температурный диапазон="-55°C ~ 125°C", Тип элемента=Конденсатор, Точность=10%
  C148: Артикул=CL10B102KC8NNNC, Диэлектрик=X7R, Корпус="0603 (1608 Metric)", Напряжение=100V, Номинал=1nF, Производитель="Samsung Electro-Mechanics", Строка для документации=https://mm.digikey.com/Volume0/opasdata/d220001/medias/docus/1136/CL10B102KC8NNNC_Spec.pdf, Температурный диапазон="-55°C ~ 125°C", Тип элемента=Конденсатор, Точность=10%
  C154: Артикул=CC0603KRX7R9BB822, Диэлектрик=X7R, Корпус="0603 (1608 Metric)", Напряжение=50V, Номинал=8.2nF, Производитель=Yageo, Строка для документации=https://www.yageo.com/upload/media/product/productsearch/datasheet/mlcc/UPY-GPHC_X7R_6.3V-to-250V_23.pdf, Температурный диапазон="-55°C ~ 125°C", Тип элемента=Конденсатор, Точность=10%
  C165: Артикул=CC0805KRX7R0BB681, Диэлектрик=X7R, Корпус="0603 (1608 Metric)", Напряжение=100V, Номинал=680pF, Производитель=Yageo, Строка для документации=https://www.yageo.com/upload/media/product/productsearch/datasheet/mlcc/UPY-NP0X7R_MV_100-to-630V_25.pdf, Температурный диапазон="-55°C ~ 125°C", Тип элемента="Керамический конденсатор", Точность=10%
DA5: "Микросхема понижающего преобразователя", Артикул=TPS54332DDAR, Вид монтажа=SMD, Корпус="8-SO PowerPad", Производитель="Texas Instruments", Строка для документации=https://www.ti.com/lit/ds/symlink/tps54332.pdf?HQS=dis-dk-null-digikeymode-dsf-pf-null-wwe&ts=1695724814144&ref_url=https%253A%252F%252Fwww.ti.com%252Fgeneral%252Fdocs%252Fsuppproductinfo.tsp%253FdistId%253D10%2526gotoUrl%253Dhttps%253A%252F%252Fwww.ti.com%252Flit%252Fgpn%252Ftps54332, Температурный диапазон="-40°C ~ 150°C", Тип элемента=Микросхема
DD2: library part LAN8742A, "Микросхема физического уровня Ethernet RMII 10/100", Артикул=LAN8742AI-CZ, Вид монтажа=SMD, Корпус=SQFN24, Название=LAN8742A, Производитель="Microchip Technology", Строка для документации=https://ww1.microchip.com/downloads/en/DeviceDoc/DS_LAN8742_00001989A.pdf, Температурный диапазон="-40°C ~ 85°C", Тип элемента=Микросхема
DD3: library part TMC4671, "Микросхема драйвер двигателя", Артикул=TMC4671-LA, Вид монтажа=SMD, Корпус=QFN-76, Название=TMC4671, Производитель="Trinamic Motion Control GmbH", Строка для документации=https://mm.digikey.com/Volume0/opasdata/d220001/medias/docus/310/TMC4671_v1.06.pdf, Температурный диапазон="-40°C ~ 125°C", Тип элемента=Микросхема
DD4: library part OSC_STD, "Кварцевый генератор", Артикул=ASE-25.000MHZ-L-C-T, Вид монтажа=SMD, Корпус="3.20mm x 2.50mm", Номинал=25MHz, Производитель="Abracon LLC", Строка для документации=https://abracon.com/Oscillators/ASEseries.pdf, Температурный диапазон="-40°C ~ 85°C", Тип элемента="Кварцевый генератор", Точность=50ppm
HL1 HL2 HL3 HL4: library part LED, "Светодиод", Вид монтажа=SMD, Напряжение=Vf=2V, Производитель="G-nor Electronics", Строка для документации=http://www.g-nor.com/Uploads/Ed/file/20210517/1621223120713818.doc, Температурный диапазон="-40°C ~ 80°C", Тип элемента=Светодиод
  HL1: Артикул=GNL-0603SRC, Название="LED1 Red", Примечание="Красный, 15mCd"
  HL2: Артикул=GNL-0603GC, Название="LED2 Green", Примечание="Зеленый, 12mCd"
  HL3: Артикул=GNL-0603GC, Название="LED3 Green", Примечание="Зеленый, 12mCd"
  HL4: Артикул=GNL-0603GC, Название=+5V, Примечание="Зеленый, 12mCd"
J1: library part JUMP, "Перемычка", Артикул=PLS-2, Вид монтажа=Through-hole, Название="MCU Boot", Производитель="Connfly electronic", Тип элемента=Перемычка
L1 L2 L3 L4: library part IND, "Дроссель", Артикул=BLM18AG601SN1D, Вид монтажа=SMD, Корпус="0603 (1608 Metric)", Номинал="600R, 500mA", Примечание=380mOhm, Производитель="Murata Electronics", Строка для документации=https://www.murata.com/en-us/products/productdata/8796738650142/ENFA0003.pdf, Температурный диапазон="-55°C ~ 125°C", Тип элемента="Дроссель подавления ЭМП"
R1 R2 R3 R4 R5 R6 R7 R8 R9 R10 R12 R13 R17 R18 R19 R20 R25 R26 R27 R28 R29 R33 R34 R35 R36 R37 R38 R39 R40 R41 R42 R43 R44 R45 R46 R47 R48 R49 R50 R51 R52 R53 R54 R129 R131 R138 R139 R141 R143 R145 R156 R162 R168: library part RES, "Резистор", Вид монтажа=SMD, Температурный диапазон="-55°C ~ 155°C", Тип элемента=Резистор
  R1 R2 R3 R20: Артикул=RC0603JR-071K5L, Корпус="0603 (1608 Metric)", Напряжение=50V, Номинал=1.5k, Производитель=Yageo, Строка для документации=https://www.yageo.com/upload/media/product/productsearch/datasheet/rchip/PYu-RC_Group_51_RoHS_L_12.pdf, Точность=5%
  R4 R5 R6 R8 R17 R18 R19 R29 R34 R35 R36 R37 R42 R43 R45 R46 R48 R49 R50 R52 R54 R168: Артикул=RC0603JR-0710KL, Корпус="0603 (1608 Metric)", Напряжение=50V, Номинал=10k, Примечание=0.1W, Производитель=Yageo, Строка для документации=https://www.yageo.com/upload/media/product/productsearch/datasheet/rchip/PYu-RC_Group_51_RoHS_L_12.pdf, Точность=5%
  R7: Артикул=RC0603JR-0710KL, Корпус="0603 (1608 Metric)", Напряжение=50V, Номинал=DNI, Примечание=0.1W, Производитель=Yageo, Строка для документации=https://www.yageo.com/upload/media/product/productsearch/datasheet/rchip/PYu-RC_Group_51_RoHS_L_12.pdf, Точность=5%
  R9 R38 R131: Артикул=RC0603JR-070RL, Корпус="0603 (1608 Metric)", Напряжение=50V, Номинал=0, Производитель=Yageo, Строка для документации=https://www.yageo.com/upload/media/product/productsearch/datasheet/rchip/PYu-RC_Group_51_RoHS_L_12.pdf, Точность=5%
  R10: Артикул=RC0603FR-0727KL, Корпус="0603 (1608 Metric)", Напряжение=50V, Номинал=27k, Производитель=Yageo, Строка для документации=https://www.yageo.com/upload/media/product/productsearch/datasheet/rchip/PYu-RC_Group_51_RoHS_L_12.pdf, Точность=1%
  R12 R13 R40: Артикул=RC0603JR-071KL, Корпус="0603 (1608 Metric)", Напряжение=50V, Номинал=1k, Производитель=Yageo, Строка для документации=https://www.yageo.com/upload/media/product/productsearch/datasheet/rchip/PYu-RC_Group_51_RoHS_L_12.pdf, Точность=5%
  R25 R26 R27 R33 R44 R47: Артикул=RC0603FR-0733RL, Корпус="0603 (1608 Metric)", Напряжение=50V, Номинал=33, Производитель=Yageo, Строка для документации=https://www.yageo.com/upload/media/product/productsearch/datasheet/rchip/PYu-RC_Group_51_RoHS_L_12.pdf, Точность=1%
  R28: Артикул=RC0603FR-0712K1L, Корпус="0603 (1608 Metric)", Напряжение=50V, Номинал=12.1k, Производитель=Yageo, Строка для документации=https://www.yageo.com/upload/media/product/productsearch/datasheet/rchip/PYu-RC_Group_51_RoHS_L_12.pdf, Точность=1%
  R39 R41 R51 R53: Артикул=RC0603FR-0710KL, Корпус="0603 (1608 Metric)", Напряжение=50V, Номинал=10k, Примечание=0.1W, Производитель=Yageo, Строка для документации=https://www.yageo.com/upload/media/product/productsearch/datasheet/rchip/PYu-RC_Group_51_RoHS_L_12.pdf, Точность=1%
  R129: Артикул=RC0603FR-074K02L, Корпус="0603 (1608 Metric)", Напряжение=50V, Номинал=4.02k, Примечание=0.1W, Производитель=Yageo, Строка для документации=https://www.yageo.com/upload/media/product/productsearch/datasheet/rchip/PYu-RC_Group_51_RoHS_L_12.pdf, Точность=1%
  R138: Артикул=RC0603FR-0739K2L, Корпус="0603 (1608 Metric)", Напряжение=50V, Номинал=39.2k, Производитель=Yageo, Строка для документации=https://www.yageo.com/upload/media/product/app/datasheet/rchip/pyu-rc_group_51_rohs_l.pdf, Точность=1%
  R139: Артикул=RC0603FR-0710K2L, Корпус="0603 (1608 Metric)", Напряжение=50V, Номинал=10.2k, Производитель=Yageo, Строка для документации=https://www.yageo.com/upload/media/product/app/datasheet/rchip/pyu-rc_group_51_rohs_l.pdf, Точность=1%
  R141: Артикул=RC0603FR-071K96L, Корпус="0603 (1608 Metric)", Напряжение=50V, Номинал=1.96k, Производитель=Yageo, Строка для документации=https://www.yageo.com/upload/media/product/app/datasheet/rchip/pyu-rc_group_51_rohs_l.pdf, Точность=1%
  R143: Артикул=RC0603FR-07332KL, Корпус="0603 (1608 Metric)", Напряжение=50V, Номинал=332k, Производитель=Yageo, Строка для документации=https://www.yageo.com/upload/media/product/app/datasheet/rchip/pyu-rc_group_51_rohs_l.pdf, Точность=1%
  R145: Артикул=RC0603FR-0768K1L, Корпус="0603 (1608 Metric)", Напряжение=50V, Номинал=68.1k, Производитель=Yageo, Строка для документации=https://www.yageo.com/upload/media/product/app/datasheet/rchip/pyu-rc_group_51_rohs_l.pdf, Точность=1%
  R156: Артикул=RC1206JR-0724RL, Корпус="1206 (3216 Metric)", Напряжение=200V, Номинал=24, Примечание=0.25W, Производитель=Yageo, Строка для документации=https://www.yageo.com/upload/media/product/productsearch/datasheet/rchip/PYu-RC_Group_51_RoHS_L_12.pdf, Точность=1%
  R162: Артикул=CR2512-JW-201ELF, Корпус="2512 (6432 Metric)", Напряжение=200V, Номинал=200, Примечание=1W, Производитель="Bourns Inc.", Строка для документации=https://www.bourns.com/docs/product-datasheets/cr.pdf, Точность=5%
VD54 VD57: library part DIODE_SCHOTTKY, "Диод Шоттки", Вид монтажа=SMD, Производитель="Diodes Incorporated", Температурный диапазон="-65°C ~ 150°C", Тип элемента="Диод Шоттки"
  VD54: Артикул=B340A-13-F, Корпус="DO-214AC, SMA", Напряжение=40V, Примечание=3A, Строка для документации=https://www.diodes.com/assets/Datasheets/ds30891.pdf
  VD57: Артикул=B260-13-F, Корпус="DO-214AA, SMB", Напряжение=60V, Примечание=2A, Строка для документации=https://www.diodes.com/assets/Datasheets/B220_A-B260_A.pdf
VD58: library part DIODE, "Диод", Артикул=MMSD4148T1G, Вид монтажа=SMD, Корпус=SOD123, Напряжение=100V, Примечание=200mA, Производитель=onsemi, Строка для документации=https://www.onsemi.com/pdf/datasheet/mmsd4148t1-d.pdf, Температурный диапазон="-55°C ~ 150°C", Тип элемента=Диод
VD63 VD65: library part ZENER, "Стабилитрон", Артикул=MMSZ5234B-7-F, Вид монтажа=SMD, Корпус=SOD123, Напряжение=6.2V, Производитель="Diodes Incorporated", Строка для документации=https://www.diodes.com/assets/Datasheets/ds18010.pdf, Температурный диапазон="-65°C ~ 150°C", Тип элемента=Стабилитрон, Точность=5%
VT3: library part N_MOSFET, "МОП транзистор, N-канальный", Артикул=BSS138K, Вид монтажа=SMD, Корпус=SOT-23-3, Напряжение=50V, Примечание=0.22A, Производитель=onsemi, Строка для документации=https://www.onsemi.com/pdf/datasheet/bss138k-d.pdf, Температурный диапазон="-55°C ~ 150°C", Тип элемента="Полевой транзистор"
VU1: library part TRANS_OPTOCPL, "Транзисторная оптопара", Артикул=FODM217AR2, Вид монтажа=SMD, Корпус="MFP4 2.5x4.4, 1.27P", Напряжение="3750VAC Rms", Примечание="CTR 80-160%", Производитель=onsemi, Строка для документации=https://www.onsemi.com/pdf/datasheet/fodm214-d.pdf, Температурный диапазон="-55°C ~ 110°C", Тип элемента="Транзисторная оптопара"
Z1: library part XTAL_2PIN, "Кварцевый резонатор, двухвыводной", Артикул=NX3215SA-32.768K, Вид монтажа=SMD, Корпус=3.2*1.5*0.8, Номинал=32768Hz, Примечание="Cl=7pF, R=70k", Производитель="NDK America, Inc.", Строка для документации=https://www.ndk.com/images/products/catalog/c_NX3215SA_e.pdf, Температурный диапазон="-40°C ~ 85°C", Тип элемента="Кварцевый резонатор", Точность=20ppm
Z2 Z3: library part XTAL_3PIN, "Кварцевый резонатор, трехвыводной", Артикул=NX3225GA-25.000M, Вид монтажа=SMD, Корпус="3.20mm x 2.50mm", Номинал=25MHz, Примечание="Cl=8pF, R=50", Производитель="NDK America, Inc.", Строка для документации=https://www.ndk.com/en/products/upload/lineup/pdf/NDKX03-00006_en.pdf, Температурный диапазон="-40°C ~ 85°C", Тип элемента="Кварцевый резонатор", Точность=20ppm

## Free pads (board coordinates)
  round 6 hole 3.2: 33(3.991,3.995) 33(3.991,24.815) 33(3.997,94.81) 33(59.998,24.815) 33(60.004,94.81) 33(69.993,24.82) 33(69.998,94.816) 33(126,4) 33(126,24.82) 33(126.005,94.816)

## Via types
v1: diameter 0.6, hole 0.3, Top Layer to Bottom Layer, tented both sides, 367 vias
v2: diameter 0.6, hole 0.3, Top Layer to Bottom Layer, 1 vias

## Nets (pads, with @x,y where several pads share a name; then routed paths per layer and width w, separated by ;. In a path a pad name is that pad's centre, name@x,y a point inside that pad or via, vN(x,y) a via of type N, cw(c..) or ccw(c..) an arc to the next point about the centre after c; other vN are vias at no path point)
1V8_EN: 
5V_EN_DIV: DA5.3 R143.2 R145.1 | length 5.7
  Top Layer w0.125: DA5.3@87.6,42.035 88.535,42.035 88.725,42.225 R145.1@88.725,45.075 R143.2@90.325,45.075
12V_EN:  | length 31.9
  Top Layer w0.125: 69.375,66.45 70.325,66.45 70.575,66.2 v1(70.575,64.95) ; v1(70.575,49.45) 73.563,46.462 80.712,46.462 82.425,48.175
  Bottom Layer w0.125: v1(70.575,49.45) v1(70.575,64.95)
24VIN_ADC: R10.1 | length 9.6
  Top Layer w0.125: v1(91.925,45.975) R10.1@91.925,45.075 93.525,45.075
  Bottom Layer w0.125: v2(91.45,52.9) 91.925,52.425 v1(91.925,45.975)
25MHZ_TMC_A: DD3.51 R47.1 | length 15
  Top Layer w0.125: DD3.51@45.025,83.025 47.225,83.025 v1(47.525,83.325) ; v1(58.25,83.425) R47.1@59.15,83.425
  Bottom Layer w0.125: v1(47.525,83.325) 47.625,83.225 48.4,82.45 54.75,82.45 55.725,83.425 v1(58.25,83.425)
25MHZ_TMC_B: R44.1 | length 7
  Top Layer w0.125: R44.1@62.65,83.825 63.625,83.825 64.513,84.713 66.163,84.713 v1(68.375,86.925)
485_A: 
485_B: 
485_RX:  | length 0.7
  Top Layer w0.125: v1(86,72.95) 86,73.6
485_TE:  | length 22.8
  Top Layer w0.125: 73.25,83.825 73.25,74.429 75.729,71.95 84.875,71.95 v1(85.375,72.45)
485_TX: 
  other v1: 86.625,73.45
+1V8: 
+3V3_MC: C9.2 C10.2 C15.2 C16.2 C17.2 C18.2 C19.2 C20.2 C21.2 C28.2 C40.2 C41.2 C42.2 C43.2 C44.2 C45.2 C49.2 C50.2 DD2.9 DD3.2 DD3.13 DD3.43 DD3.52 DD3.61 DD3.72 J1.1 L1.1 L2.1 L3.2 R1.1 R2.1 R3.1 R4.1 R5.1 R6.1 R7.1 R17.1 R18.1 R19.1 R20.1 R34.1 R37.2 R42.2 R43.2 R46.2 R48.2 R49.2 | length 61.4
  Top Layer w0.125: C43.2@46.45,83.925 C43.2@46.525,83.925 ; v1(68,64.45) 68.5,64.95 69.375,64.95
  Top Layer w0.17: C40.2@33.225,83.025 DD3.2@34.625,83.025 ; DD3.72@36.875,83.975 v1(36.875,85.175) ; DD3.61@41.275,83.975 v1(41.275,85.175) ; DD3.43@45.025,79.825 v1(46.225,79.825) v1@46.234,79.825 ; DD3.52@45.025,83.425 45.95,83.425 C43.2@46.45,83.925
  Top Layer w0.2: v1(33.225,78.425) 33.75,78.425 33.95,78.625 DD3.13@34.725,78.625
  Top Layer w0.25: DD2.9@61.725,43.35 v1(61.725,44.525) ; v1(68,64.45) 69.375,64.45 ; v1(68,70.95) 69.375,70.95 ; v1(68,75.95) 69.375,75.95 ; v1(70.85,85.2) 71.25,84.8 71.25,83.825 ; 77.75,83.825 v1(77.75,85.2) ; v1(79.25,61.2) 79.25,62.575 ; 83.25,83.825 v1(83.25,85.2) ; v1(85.75,61.2) 85.75,62.575
  Top Layer w0.45: v1(26.35,76.125) R43.2@26.35,77.025 ; v1(28.525,76.125) R46.2@28.525,77.025 ; v1(29.925,76.125) R48.2@29.925,77.025 ; v1(31.325,76.125) R49.2@31.325,77.025 ; v1(31.425,82.125) 31.425,83.025 C40.2@33.225,83.025 v1(33.225,82.125) ; C41.2@33.225,77.525 v1(33.225,78.425) ; v1(36.875,85.175) C45.2@36.875,86.175 ; v1(41.275,85.175) C44.2@41.275,86.1 ; v1@46.234,79.825 46.54,79.52 C42.2@47.37,79.52 ; C43.2@46.525,83.925 46.6,83.925 v1(47.525,84.85) ; C50.2@51.125,83.925 v1(51.125,84.825) ; R37.2@54.3,85.525 v1(54.3,86.425) ; v1(55.45,78.125) L3.2@56.35,78.125 ; R34.1@56.875,50.075 v1(56.875,50.975) ; v1(57.8,69.725) R3.1@58.7,69.725 ; v1(57.8,71.325) R2.1@58.7,71.325 ; v1(57.8,72.925) R1.1@58.7,72.925 ; R20.1@58.475,50.075 v1(58.475,50.975) ; R19.1@60.075,50.075 v1(60.075,50.975) ; v1(61.725,44.525) C28.2@61.725,45.425 ; v1(62.75,86.1) R42.2@63.65,86.1 ; R17.1@63.325,50.075 v1(63.325,50.975) ; v1(64.6,69.55) R5.1@65.5,69.55 ; R18.1@64.975,50.075 v1(64.975,50.975) ; v1(66.175,50.975) 66.175,50.525 L2.1@66.625,50.075 67.075,50.525 v1(67.075,50.975) ; C20.2@67.1,64.45 v1(68,64.45) ; C19.2@67.1,70.95 v1(68,70.95) ; R7.1@67.1,73.95 v1(68,73.95) ; C18.2@67.1,75.95 v1(68,75.95) ; v1(69.45,85.2) C21.2@69.45,86.1 ; v1(70.85,85.2) C17.2@70.85,86.1 ; v1(77.75,85.2) C16.2@77.75,86.1 ; C9.2@79.25,60.3 v1(79.25,61.2) ; v1(83.25,85.2) C15.2@83.25,86.1 ; C10.2@85.75,60.3 v1(85.75,61.2) ; v1(86.15,54.25) R4.1@86.15,55.15 ; 86.75,87.7 86.75,88.6 ; v1(92.275,57.8) L1.1@92.275,58.7
+3V3_VA: C22.2 C23.2 C24.2 L1.2 | length 8.5
  Top Layer w0.25: 86.75,62.575 86.75,61.4 87.15,61 C22.2@87.15,60.3 ; 87.725,61.075 88.275,61.075 88.546,60.804 88.546,60.304 C23.2@88.55,60.3
  Top Layer w0.45: C22.2@87.15,60.3 C23.2@88.55,60.3 v1(89.45,60.3) ; v1(90.875,61.2) C24.2@90.875,60.3 L1.2@92.275,60.3
+5_REF_A: C38.2 C39.2 C53.2 DD3.23 L4.2 R39.2 R51.2 | length 14.2
  Top Layer w0.17: DD3.23@38.475,77.675 38.475,76.925 38.7,76.7 39.075,76.7
  Top Layer w0.45: v1(36.425,69.425) R39.2@36.425,70.325 ; 39.075,76.7 40.15,76.7 v1(40.625,76.225) C38.2@40.625,75.35 C39.2@42.025,75.35 42.875,75.35 43.15,75.075 v1(43.15,71.925) C53.2@42.025,71.925 L4.2@40.625,71.925 ; v1(39.225,69.425) R51.2@39.225,70.325
+5_REF_B: 
+5V: HL4.2 L4.1 R139.1 | length 2.7
  Top Layer w0.45: v1(40.625,69.425) L4.1@40.625,70.325 ; v1(76.175,36.975) HL4.2@77.075,36.975 ; v1(76.175,45.25) R139.1@77.075,45.25
+12V: 
+24_FUSE: C146.2 C162.2 C163.2 C164.2 C165.2 DA5.2 R10.2 R143.1 VD57.1 | length 10.6
  Top Layer w0.25: C146.2@89.96,40.765 C146.2@90,40.725
  Top Layer w0.45: VD57.1@45.575,51.185 45.92,51.185 47.135,52.4 C165.2@49,52.4 ; v1(90.325,42.05) R143.1@90.325,43.475 ; v1(91.925,42.05) R10.2@91.925,43.475 ; 92.45,40.725 v1(93.875,40.725)
  Top Layer w0.6: DA5.2@87.6,40.765 C146.2@89.96,40.765
  other v1: 93.875,42.05 37.275,52.55 38.5,52.55 39.725,52.55 40.95,52.55 42.175,52.55 44.225,53.225 45.575,53.225 46.925,53.225 26.875,53.25 29.575,53.25 32.275,53.25 34.975,53.25
+24V: 
+24V_FUSE_2: 
A_EEPROM_A0: R42.1
A_EEPROM_A1: R45.1
A_I0_N: C52.2 DD3.17 R39.1 R41.2 | length 7.9
  Top Layer w0.125: R41.2@35.025,71.925 R39.1@36.425,71.925 35.7,72.65 35.7,74.647 36.403,75.35 C52.2@36.425,75.35 36.425,76.425 36.075,76.775 DD3.17@36.075,77.675
A_I0_P: DD3.16 | length 15.9
  Top Layer w0.125: v1(32.925,86.575) 32.925,87.7 ; DD3.16@35.675,77.675 35.675,76.604 35.925,76.354 v1(35.925,76.225)
  Bottom Layer w0.125: v1(32.925,86.575) 32.35,86 32.35,77.75 33.875,76.225 v1(35.925,76.225)
A_I1_N: C54.2 DD3.19 R51.1 R53.2 | length 8.1
  Top Layer w0.125: DD3.19@36.875,77.675 36.875,77.025 37.825,76.075 C54.2@37.825,75.35 ; C54.2@37.803,75.35 37.125,74.672 37.125,72.625 R53.2@37.825,71.925 R51.1@39.225,71.925
A_I1_P: DD3.18 | length 17.2
  Top Layer w0.125: DD3.18@36.475,77.675 36.475,76.731 v1@36.891,76.316
  Bottom Layer w0.125: v1(30.38,86.575) 30.38,79.22 33.925,75.675 36.4,75.675 v1(36.95,76.225)
A_I_COMMON:  | length 41.2
  Top Layer w0.125: v1(74.425,79.35) 75.75,78.025 v1(75.75,73.125)
  Bottom Layer w0.125: 62.125,90.325 67.275,85.175 67.275,80.775 68.7,79.35 v1(74.425,79.35) ; v1(75.75,73.125) 76.875,74.25 81.457,74.25 82.725,72.982 82.725,69.321 83.346,68.7 84.75,68.7 85.5,69.45
A_PWM_UX1_H: DD3.39 | length 20.8
  Top Layer w0.125: DD3.39@45.025,78.225 45.725,78.225 45.9,78.05 52.7,78.05 56.575,81.925 56.575,83.375 60.9,87.7
A_PWM_UX1_L: DD3.40 | length 19.8
  Top Layer w0.125: DD3.40@45.025,78.625 45.725,78.625 46,78.35 52.575,78.35 56.3,82.075 56.3,84.8 59.2,87.7
A_PWM_VX2_H: DD3.41 | length 18.8
  Top Layer w0.125: DD3.41@45.025,79.025 45.725,79.025 46.15,78.6 52.45,78.6 56.05,82.2 56.05,86.25 57.5,87.7
A_PWM_VX2_L: DD3.42 | length 17.8
  Top Layer w0.125: DD3.42@45.025,79.425 45.725,79.425 46.288,78.863 52.337,78.863 55.79,82.315 55.79,87.69
A_PWM_WY1_H: DD3.46 | length 11.6
  Top Layer w0.125: DD3.46@45.025,81.025 45.725,81.025 46.288,81.588 48.238,81.588 49.775,83.125 49.775,84.225 53.25,87.7
A_PWM_WY1_L: DD3.47 | length 10.5
  Top Layer w0.125: DD3.47@45.025,81.425 45.725,81.425 46.138,81.838 48.113,81.838 49.525,83.25 49.525,85.675 51.55,87.7
A_PWM_Y2_H: DD3.48 | length 9.5
  Top Layer w0.125: DD3.48@45.025,81.825 45.725,81.825 45.988,82.088 47.988,82.088 49.275,83.375 49.275,87.125 49.85,87.7
A_PWM_Y2_L: DD3.49 | length 8.8
  Top Layer w0.125: DD3.49@45.025,82.225 45.725,82.225 45.838,82.338 47.863,82.338 48.725,83.2 48.725,87.125 48.15,87.7
ABS_ENC_1_CK:  | length 18.3
  Top Layer w0.125: v1(72.75,61.375) 72.75,62.575 ; v1(74.75,65.975) 85.025,65.975 v1(86,66.95)
  Bottom Layer w0.125: v1(72.75,61.375) 74.75,63.375 v1(74.75,65.975)
ABS_ENC_1_CK_N: 
ABS_ENC_1_CK_P: 
ABS_ENC_1_DATA:  | length 16.2
  Top Layer w0.125: 73.25,62.575 v1(73.25,63.775) ; v1(73.75,66.6) 84.525,66.6 v1(85.375,67.45)
  Bottom Layer w0.125: v1(73.25,63.775) 73.75,64.275 v1(73.75,66.6)
ABS_ENC_1_DATA_N: 
ABS_ENC_1_DATA_P: 
ABS_ENC_1_FS:  | length 16.9
  Top Layer w0.125: 72.25,62.575 v1(72.25,63.775) ; v1(73.25,67.225) 84.025,67.225 v1(84.75,67.95)
  Bottom Layer w0.125: v1(72.25,63.775) 73.25,64.775 v1(73.25,67.225)
ABS_ENC_2_CK:  | length 2.1
  Top Layer w0.125: v1(80.75,61.375) 80.75,62.575
  Bottom Layer w0.125: v1(80.75,61.375) 81.4,62.025
ABS_ENC_2_CK_N: 
ABS_ENC_2_CK_P: 
ABS_ENC_2_DATA:  | length 19
  Top Layer w0.125: v1(71.75,61.375) 71.75,62.575 ; v1(74.25,65.35) 85.525,65.35 v1(86.625,66.45)
  Bottom Layer w0.125: v1(71.75,61.375) 74.25,63.875 v1(74.25,65.35)
ABS_ENC_2_DATA_N: 
ABS_ENC_2_DATA_P: 
ABS_ENC_2_FS:  | length 2.9
  Top Layer w0.125: 81.25,62.575 v1(81.25,63.775)
  Bottom Layer w0.125: v1(81.25,63.775) 81.25,62.7 81.675,62.275
ACC_CS: 
ACC_INT1:  | length 18.9
  Top Layer w0.125: 69.375,74.45 70.754,74.45 76.254,68.95 v1(86,68.95)
ACC_INT2:  | length 18.3
  Top Layer w0.125: 69.375,73.95 70.9,73.95 76.4,68.45 v1(85.375,68.45)
ACC_MISO: 
ACC_MOSI: 
ACC_SCK: 
AUX_D: VU1.4 | length 1.4
  Top Layer w0.125: VU1.4@34.425,36.365 VU1.4@34.435,36.375
  Top Layer w0.25: 34.425,35 VU1.4@34.425,36.365
B_EEPROM_A0: 
B_EEPROM_A1: 
B_I0_N: 
B_I0_P: 
B_I1_N: 
B_I1_P: 
B_I_COMMON: 
B_PWM_UX1_H: 
B_PWM_UX1_L: 
B_PWM_VX2_H: 
B_PWM_VX2_L: 
B_PWM_WY1_H: 
B_PWM_WY1_L: 
B_PWM_Y2_H: 
B_PWM_Y2_L: 
BOOT0: J1.2 R12.1 | length 15.3
  Top Layer w0.125: v1(61.25,66.7) 66.55,66.7 67.1,67.25 R12.1@67.1,67.45 69.375,67.45
  Bottom Layer w0.125: J1.2@58,61.27 61.25,64.52 v1(61.25,66.7)
BRAKE_A: DD3.31 | length 21.9
  Top Layer w0.125: 38.025,87.7 38.9,86.825 v1(38.9,85.175) ; v1@41.478,76.478 41.478,76.889 41.675,77.086 DD3.31@41.675,77.675
  Bottom Layer w0.125: v1(38.9,85.175) 39.775,84.3 44.525,84.3 45,83.825 45,76.946 43.979,75.925 42.025,75.925 v1(41.475,76.475)
BRAKE_B: 
CCW_BTN_1:  | length 22.2
  Top Layer w0.125: 69.375,74.95 70.607,74.95 76.107,69.45 v1(84.125,69.45)
  Bottom Layer w0.125: v1(84.125,69.45) 84.625,69.95 84.625,72.8 85.8,73.975
CCW_BTN_1_cn: 
CCW_BTN_2:  | length 22.5
  Top Layer w0.125: 69.375,77.45 71.089,77.45 72.5,76.039 72.5,74.118 75.668,70.95 v1(84.125,70.95)
  Bottom Layer w0.125: v1(84.125,70.95) 84.125,72.675 85.675,74.225
CCW_BTN_2_cn: 
COMP: 
CP: 
CS: 
CTRL_422_A: 
CTRL_422_B: 
CTRL_422_RX:  | length 18.9
  Top Layer w0.125: 69.375,75.45 70.461,75.45 75.698,70.212 84.762,70.212 85,70.45 v1(86,70.45)
CTRL_422_TX:  | length 21.3
  Top Layer w0.125: 69.375,76.95 71.236,76.95 72.25,75.936 72.25,74.014 75.802,70.462 84.562,70.462 85.05,70.95 v1(86.625,70.95)
CTRL_422_Y: 
CTRL_422_Z: 
DIR_OUT_1: 
DIR_OUT_1_CN: 
DIR_OUT_2: 
DIR_OUT_2_CN: 
DOUT_1:  | length 31.4
  Top Layer w0.125: v1(75.75,49.45) 77.3,49.45 77.8,48.95 80.354,48.95 81.604,50.2 81.622,50.2 92.448,50.2 ; v1(75.75,54.2) 75.75,54.875 77.75,56.875 77.75,62.575
  Bottom Layer w0.125: v1(75.75,49.45) v1(75.75,54.2)
DOUT_1_CN: 
DOUT_2:  | length 31.2
  Top Layer w0.125: v1(76.375,48.95) 77.425,48.95 77.675,48.7 80.457,48.7 81.707,49.95 81.725,49.95 92.552,49.95 ; v1(76.375,53.7) 76.375,54.925 78.25,56.8 78.25,62.575
  Bottom Layer w0.125: v1(76.375,48.95) v1(76.375,53.7)
DOUT_2_CN: 
DOUT_3:  | length 31.6
  Top Layer w0.125: v1(77,48.45) 80.561,48.45 81.811,49.7 81.829,49.7 92.655,49.7 ; v1(77,54.2) 79.925,57.125 79.925,61.2 79.75,61.375 79.75,62.575
  Bottom Layer w0.125: v1(77,48.45) v1(77,54.2)
DOUT_3_CN: 
DOUT_4:  | length 31.5
  Top Layer w0.125: v1(77.625,47.95) 80.414,47.95 81.914,49.45 81.932,49.45 92.759,49.45 ; v1(77.625,53.7) 80.25,56.325 80.25,62.575
  Bottom Layer w0.125: v1(77.625,47.95) v1(77.625,53.7)
DOUT_4_CN: 
DRAIN: 
DRV_A_EN: DD3.32 | length 22.3
  Top Layer w0.125: 35.475,87.7 36.175,87 37.325,87 37.95,86.375 v1(37.95,85.175) ; DD3.32@42.075,77.675 42.075,77.086 42.272,76.889 v1@42.272,76.478
  Bottom Layer w0.125: v1(37.95,85.175) 39.075,84.05 44.421,84.05 44.75,83.721 44.75,77.05 44.175,76.475 v1(42.275,76.475)
DRV_B_EN: 
E_GND: 
EEPROM_SCL: 
EEPROM_SDA: 
ETH_RX_N: DD2.22 | length 7
  Top Layer w0.125: DD2.22@61.725,39.45 61.725,39.137 61.848,39.014 61.848,38.542 62.253,38.136 62.253,36.807 63.96,35.1 63.96,33.41
ETH_RX_P: DD2.23 | length 7
  Top Layer w0.125: DD2.23@62.225,39.45 62.225,39.137 62.103,39.014 62.103,38.647 62.508,38.242 62.508,36.912 64.215,35.206 64.215,33.41
ETH_TX_N: DD2.20 | length 7
  Top Layer w0.125: 59.535,33.41 59.535,35.196 61.253,36.914 61.253,38.136 60.848,38.542 60.848,39.014 60.725,39.137 DD2.20@60.725,39.45
ETH_TX_P: DD2.21 | length 7
  Top Layer w0.125: 59.79,33.41 59.79,35.09 61.508,36.808 61.508,38.242 61.103,38.647 61.103,39.014 61.225,39.137 DD2.21@61.225,39.45
ETH_XTAL_IN: C34.1 DD2.5 Z3.1 | length 6.8
  Top Layer w0.125: DD2.5@63.425,42.15 64.175,42.15 64.75,41.575 66.975,41.575 67.775,42.375 Z3.1@67.875,42.375 C34.1@69.7,42.375
ETH_XTAL_OUT: C35.1 DD2.4 Z3.3 | length 4.9
  Top Layer w0.125: DD2.4@63.425,41.65 64.175,41.65 64.625,41.2 65.25,41.2 Z3.3@65.675,40.775 65.715,40.775 66.175,40.315 66.175,39.95 67,39.125 C35.1@67,39.05
FB: 